# Altium PCB ELC102 - Score Board.PcbDoc (part 4 of 4)
Units mil, origin at the board's own origin, x right, y up, seen from the top; angles counter-clockwise.
Board outline 15000 x 7000 mil, 4 copper layers (Top Layer, Ground, Power, Bottom Layer); 609 components, 525 nets, 1780 pads, 561 vias.
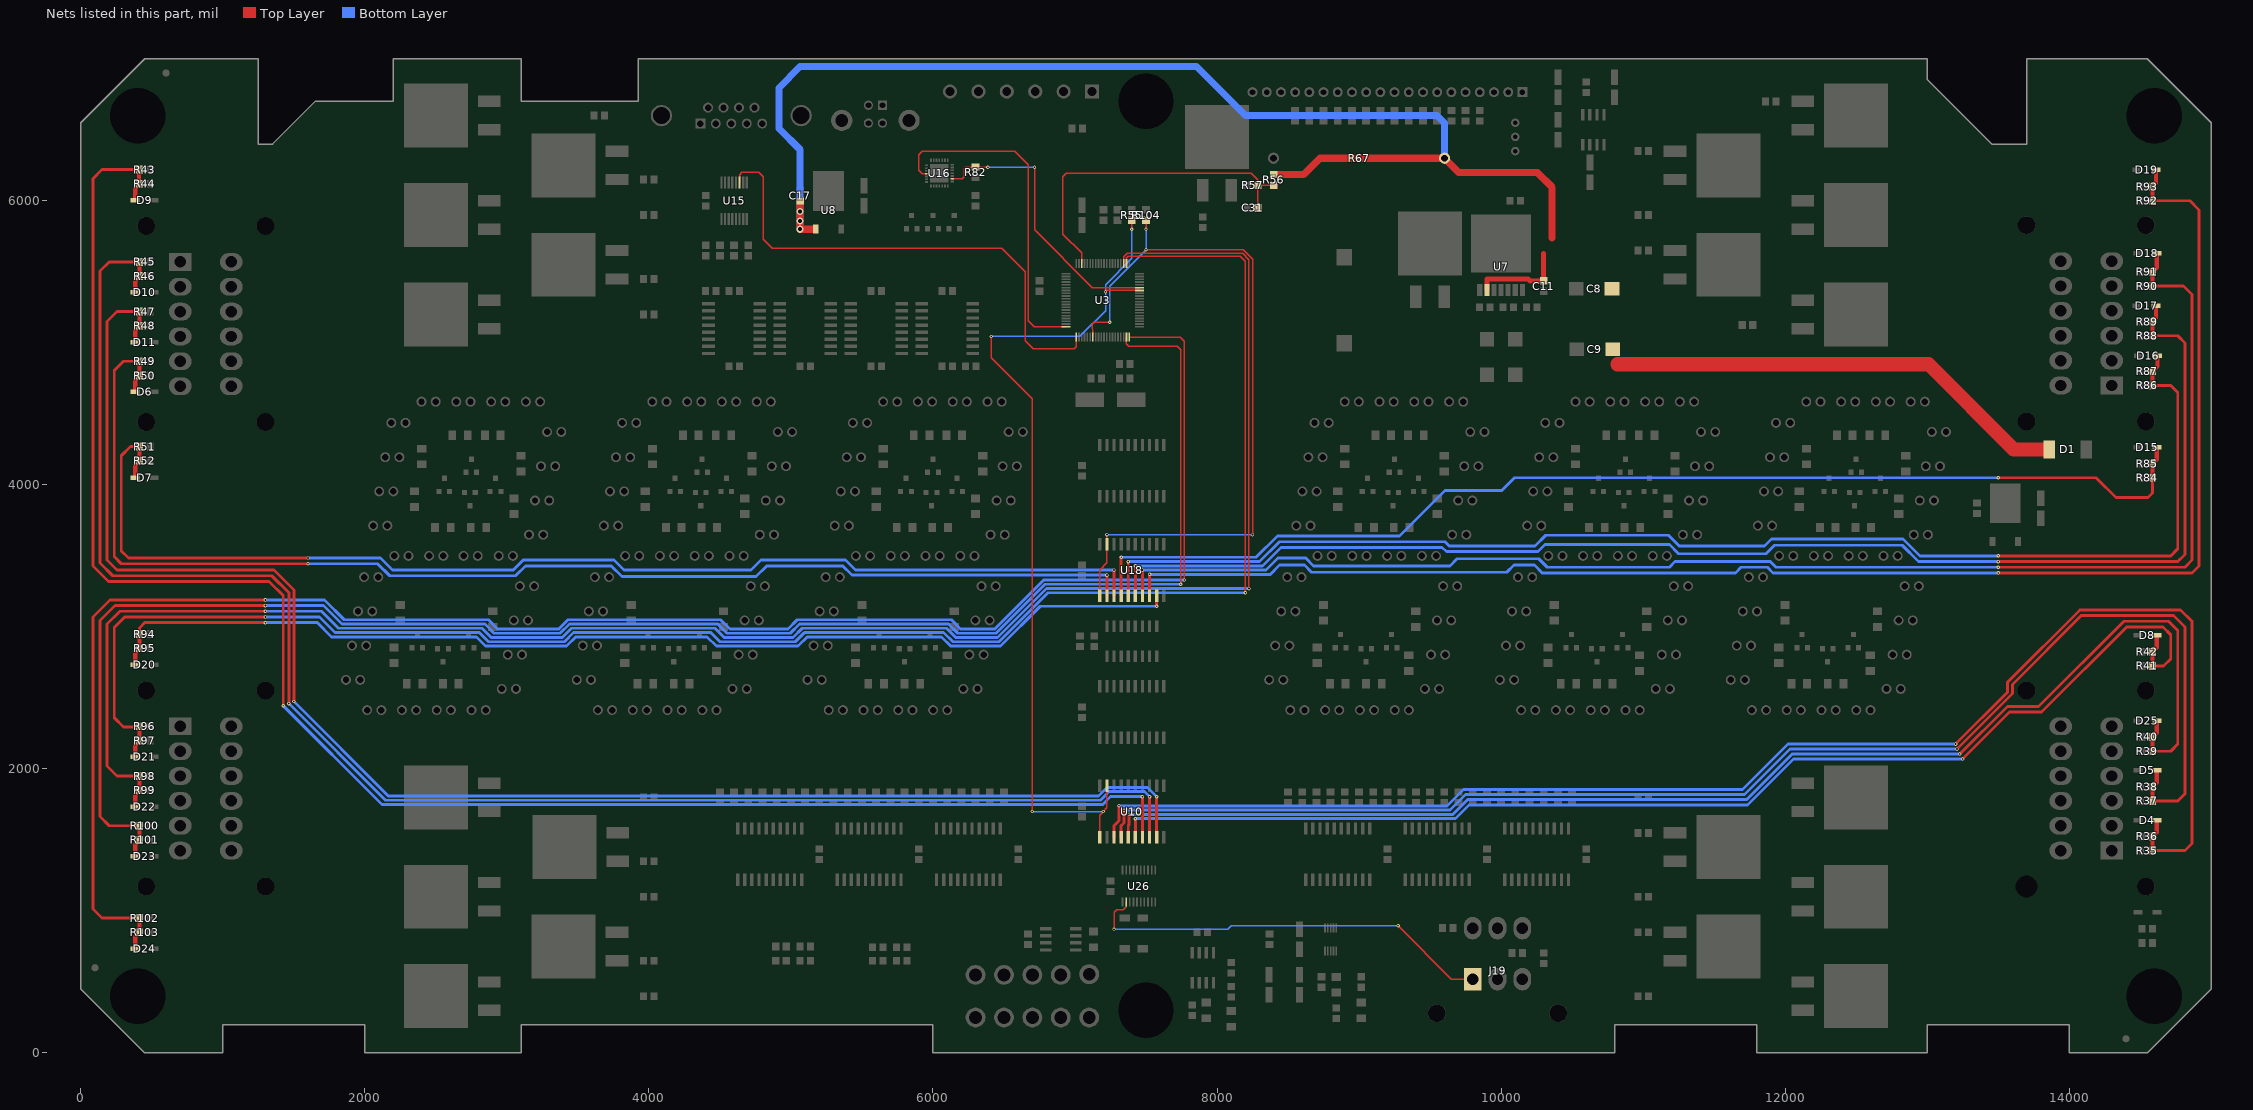
[diagram p6: the nets of this part, all layers, seen from the top]

## Via types
v1: diameter 24, hole 12, Top Layer to Bottom Layer, 468 vias
v2: diameter 50, hole 28, Top Layer to Bottom Layer, 93 vias

## Nets (pads, with @x,y where several pads share a name; then routed paths per layer and width w, separated by ;. In a path a pad name is that pad's centre, name@x,y a point inside that pad or via, vN(x,y) a via of type N, cw(c..) or ccw(c..) an arc to the next point about the centre after c; other vN are vias at no path point) (continued)
SWITCH1: D4.2 R35.1 R36.1 U10.3 | length 10527.5
  Top Layer w20: U10.3@7275,1518.9 7275,1600 7310,1635 v1(7310,1740) ; v1(13200,2175) 13565,2540 13565,2610 14075,3120 14785,3120 14865,3040 14865,1475 14815,1425 R35.1@14587,1425
  Top Layer w30: R35.1@14587,1425 R36.1@14587,1525 14616.93,1554.93 D4.2@14616.93,1640
  Bottom Layer w20: v1(7310,1740) 9620,1740 9735,1855 11700,1855 12020,2175 v1(13200,2175)
SWITCH2: D5.2 R37.1 R38.1 U10.4 | length 9959.2
  Top Layer w20: U10.4@7325,1518.9 7325,1600 7345,1620 v1(7345,1710) ; v1(13210,2140) 13600,2530 13600,2595 14085,3080 14735,3080 14815,3000 14815,1825 14765,1775 R37.1@14587,1775
  Top Layer w30: R37.1@14587,1775 R38.1@14587,1875 14616.93,1904.93 D5.2@14616.93,1990
  Bottom Layer w20: v1(7345,1710) 9640,1710 9750,1820 11715,1820 12035,2140 v1(13210,2140)
SWITCH3: D25.2 R39.1 R40.1 U10.5 | length 9364.5
  Top Layer w20: U10.5@7375,1518.9 7375,1600 7380,1605 v1(7380,1680) ; v1(13230,2105) 13565,2440 13785,2440 14385,3040 14700,3040 14765,2975 14765,2175 14715,2125 R39.1@14587,2125
  Top Layer w30: R39.1@14587,2125 R40.1@14587,2225 14616.93,2254.93 D25.2@14616.93,2340
  Bottom Layer w20: v1(7380,1680) 9660,1680 9765,1785 11730,1785 12050,2105 v1(13230,2105)
SWITCH4: D8.2 R41.1 R42.1 U10.6 | length 8544.2
  Top Layer w20: U10.6@7425,1518.9 v1@7425,1645 ; v1(13250,2070) 13580,2400 13805,2400 14405,3000 14660,3000 14715,2945 14715,2775 14665,2725 R41.1@14587,2725
  Top Layer w30: R41.1@14587,2725 R42.1@14587,2825 14616.93,2854.93 D8.2@14616.93,2940
  Bottom Layer w20: v1(7425,1650) 9680,1650 9775,1745 11735,1745 12060,2070 v1(13250,2070)
SWITCH5: D9.2 R43.1 R44.1 U10.7 | length 12153.1
  Top Layer w20: R43.1@413,6220 410,6220 150,6220 85,6155 85,3430 195,3320 1325,3320 1425,3220 v1(1425,2445) ; U10.7@7475,1518.9 v1(7475,1805)
  Top Layer w30: D9.2@383.07,6005 383.07,6090.07 R44.1@413,6120 ; R44.1@410,6123 R43.1@410,6220
  Bottom Layer w20: v1(1425,2445) 2120,1750 7195,1750 7250,1805 v1(7475,1805)
SWITCH6: D10.2 R45.1 R46.1 U10.8 | length 11451.4
  Top Layer w20: R45.1@413,5570 200,5570 135,5505 135,3450 225,3360 1345,3360 1465,3240 v1(1465,2460) ; U10.8@7525,1518.9 v1(7525,1805)
  Top Layer w30: D10.2@383.07,5355 383.07,5440.07 R46.1@413,5470 R45.1@413,5570
  Bottom Layer w20: v1(1465,2460) 2145,1780 7180,1780 7240,1840 7490,1840 v1(7525,1805)
SWITCH7: D11.2 R47.1 R48.1 U10.9 | length 11039.7
  Top Layer w20: R47.1@413,5220 255,5220 185,5150 185,3470 255,3400 1360,3400 1500,3260 v1(1500,2475) ; U10.9@7575,1518.9 v1(7575,1805)
  Top Layer w30: D11.2@383.07,5005 383.07,5090.07 R48.1@413,5120 R47.1@413,5220
  Bottom Layer w20: v1(1500,2475) 2165,1810 7165,1810 7225,1870 7510,1870 v1(7575,1805)
SWITCH8: D6.2 R49.1 R50.1 U18.2 | length 9052.4
  Top Layer w20: R49.1@413,4870 300,4870 235,4805 235,3495 285,3445 v1(1600,3445) ; U18.2@7225,3218.9 v1(7225,3365)
  Top Layer w30: D6.2@383.07,4655 383.07,4740.07 R50.1@413,4770 R49.1@413,4870
  Bottom Layer w20: v1(1600,3445) 2090,3445 2175,3360 3060,3360 3130,3430 3735,3430 3810,3355 4755,3355 4830,3430 5365,3430 5430,3365 v1(7225,3365)
SWITCH9: D7.2 R51.1 R52.1 U18.3 | length 8400.3
  Top Layer w20: R51.1@413,4270 350,4270 285,4205 285,3535 335,3485 v1(1600,3485) ; U18.3@7275,3218.9 v1(7275,3400)
  Top Layer w30: D7.2@383.07,4050 383.07,4140.07 R52.1@413,4170 R51.1@413,4270
  Bottom Layer w20: v1(1600,3485) 2110,3485 2195,3400 3045,3400 3115,3470 3755,3470 3825,3400 4720,3400 4790,3470 5385,3470 5455,3400 v1(7275,3400)
SWITCH10: D15.2 R84.1 R85.1 U18.4 | length 8171.1
  Top Layer w20: U18.4@7325,3218.9 v1(7325,3490) ; v1(13500,4050) 14190,4050 14330,3910 14554,3910 14587,3943 R84.1@14587,4050
  Top Layer w30: R84.1@14587,4050 R85.1@14587,4150 14616.93,4179.93 D15.2@14616.93,4265
  Bottom Layer w20: v1(7325,3490) 8275,3490 8425,3640 9285,3640 9605,3960 10005,3960 10095,4050 v1(13500,4050)
SWITCH11: D16.2 R86.1 R87.1 U18.5 | length 9378
  Top Layer w20: U18.5@7375,3218.9 v1(7375,3460) ; v1(13500,3500) 14715,3500 14765,3550 14765,4650 14715,4700 R86.1@14587,4700
  Top Layer w30: R86.1@14587,4700 R87.1@14587,4800 14621.93,4834.93 D16.2@14621.93,4910
  Bottom Layer w20: v1(7375,3460) 8300,3460 8440,3600 9605,3600 9635,3570 10240,3570 10315,3645 11180,3645 11255,3570 11855,3570 11905,3620 12830,3620 12950,3500 v1(13500,3500)
SWITCH12: D17.2 R88.1 R89.1 U18.6 | length 9767.2
  Top Layer w20: U18.6@7425,3218.9 v1(7425,3430) ; v1(13500,3460) 14765,3460 14815,3510 14815,5000 14765,5050 R88.1@14587,5050
  Top Layer w30: R88.1@14587,5050 R89.1@14587,5150 14611.93,5174.93 D17.2@14611.93,5260
  Bottom Layer w20: v1(7425,3430) 8320,3430 8450,3560 9585,3560 9615,3530 10260,3530 10310,3580 11185,3580 11250,3515 11865,3515 11925,3575 12825,3575 12940,3460 v1(13500,3460)
SWITCH13: D18.2 R90.1 R91.1 U18.7 | length 10143.8
  Top Layer w20: U18.7@7475,3218.9 v1(7475,3400) ; v1(13500,3420) 14815,3420 14865,3470 14865,5340 14805,5400 R90.1@14587,5400
  Top Layer w30: R90.1@14587,5400 R91.1@14587,5500 14616.93,5529.93 D18.2@14616.93,5630
  Bottom Layer w20: v1(7475,3400) 8345,3400 8430,3485 8625,3485 8680,3430 9640,3430 9690,3480 10265,3480 10325,3420 11185,3420 11225,3460 11895,3460 11935,3420 v1(13500,3420)
SWITCH14: D19.2 R92.1 R93.1 U18.8 | length 10776.3
  Top Layer w20: U18.8@7525,3218.9 v1(7525,3370) ; v1(13500,3380) 14865,3380 14915,3430 14915,5935 14850,6000 R92.1@14587,6000
  Top Layer w30: R92.1@14587,6000 R93.1@14587,6100 14611.93,6124.93 D19.2@14611.93,6220
  Bottom Layer w20: v1(7525,3370) 8375,3370 8440,3435 8615,3435 8665,3385 10040,3385 10090,3435 10235,3435 10290,3380 11650,3380 11690,3420 11875,3420 11915,3380 v1(13500,3380)
SWITCH15: D20.2 R94.1 R95.1 U18.9 | length 7813.6
  Top Layer w20: R94.1@413,2950 413,2993 450,3030 v1(1300,3030) ; v1(7575,3145) U18.9@7575,3218.9
  Top Layer w30: D20.2@383.07,2735 383.07,2820.07 R95.1@413,2850 R94.1@413,2950
  Bottom Layer w20: v1(1300,3030) 1665,3030 1765,2930 2785,2930 2850,2865 3420,2865 3485,2930 4410,2930 4475,2865 5050,2865 5115,2930 6060,2930 6125,2865 6475,2865 6755,3145 v1(7575,3145)
SWITCH16: D21.2 R96.1 R97.1 U3.2 | length 12609.3
  Top Layer w10: U3.2@7362.32,5559.84 7362.32,5597.32 7375,5610 8165,5610 8200,5575 v1(8200,3240)
  Top Layer w20: R96.1@413,2295 300,2295 235,2360 235,2995 310,3070 v1(1300,3070)
  Top Layer w30: D21.2@383.07,2085 383.07,2170.07 R97.1@413,2200 413,2295 R96.1@413,2300
  Bottom Layer w20: v1(1300,3070) 1680,3070 1790,2960 2805,2960 2870,2895 3405,2895 3470,2960 4435,2960 4500,2895 5030,2895 5090,2955 ; 5095,2960 6075,2960 6140,2895 6465,2895 6810,3240 v1(8200,3240)
SWITCH17: D22.2 R98.1 R99.1 U3.3 | length 13160.5
  Top Layer w10: U3.3@7342.64,5559.84 7342.64,5605.14 7367.5,5630 8180,5630 8225,5585 v1(8225,3270)
  Top Layer w20: R98.1@413,1950 255,1950 185,2020 185,3020 275,3110 v1(1300,3110)
  Top Layer w30: D22.2@383.07,1735 383.07,1820.07 R99.1@413,1850 R98.1@413,1950
  Bottom Layer w20: v1(1300,3110) 1695,3110 1815,2990 2825,2990 2890,2925 3390,2925 3455,2990 4465,2990 4530,2925 5015,2925 5080,2990 6095,2990 6160,2925 6455,2925 6800,3270 v1(8225,3270)
SWITCH18: D23.2 R100.1 R101.1 U3.59 | length 11995
  Top Layer w10: U3.59@7362.32,5040.16 7362.32,4992.68 7380,4975 7720,4975 7745,4950 v1(7745,3300)
  Top Layer w20: R100.1@413,1600 200,1600 135,1665 135,3045 240,3150 v1(1300,3150)
  Top Layer w30: D23.2@383.07,1385 383.07,1470.07 R101.1@413,1500 R100.1@413,1600
  Bottom Layer w20: v1(1300,3150) 1710,3150 1840,3020 2845,3020 2910,2955 3375,2955 3440,3020 4485,3020 4550,2955 4995,2955 5060,3020 6110,3020 6175,2955 6445,2955 6790,3300 v1(7745,3300)
SWITCH19: D24.2 R102.1 R103.1 U3.60 | length 12788
  Top Layer w10: U3.60@7382.01,5040.16 7739.84,5040.16 7770,5010 v1(7770,3330)
  Top Layer w20: R102.1@413,950 150,950 85,1015 85,3070 205,3190 v1(1300,3190)
  Top Layer w30: D24.2@383.07,735 383.07,820.07 R103.1@413,850 R102.1@413,950
  Bottom Layer w20: v1(1300,3190) 1715,3190 1855,3050 2870,3050 2935,2985 3365,2985 3430,3050 4505,3050 4570,2985 4980,2985 5045,3050 6130,3050 6195,2985 6435,2985 6780,3330 v1(7770,3330)
SWITCHES0-7: R55.2 U3.74 U10.1 U10.19 | length 6185.8
  Top Layer w10: v1(6410,5045) 6410,4895 6700,4605 v1(6700,1700) ; U10.1@7175,1518.9 7175,1675 v1(7200,1700) 7225,1725 U10.19@7225,1881.1 ; v1(7215,5360) 7223.9,5368.9 U3.74@7454.84,5368.9 ; v1(7400,5800) R55.2@7400,5863
  Bottom Layer w10: v1(6410,5045) 7035,5045 7215,5225 v1(7215,5360) 7215,5410 7400,5595 v1(7400,5800) ; v1(6700,1700) v1(7200,1700)
SWITCHES8-15: R104.2 U3.47 U18.1 U18.19 | length 5240.9
  Top Layer w10: U3.47@7126.1,5040.16 7126.1,5093.9 7120,5100 7120,5130 7135,5145 v1(7245,5145) ; U18.1@7175,3218.9 7175,3400 7225,3450 U18.19@7225,3581.1 v1(7225,3650) ; v1(7500,5655) 8185,5655 8250,5590 v1(8250,3650) ; v1(7500,5800) R104.2@7500,5863
  Bottom Layer w10: v1(7225,3650) v1(8250,3650) ; v1(7245,5145) 7245,5400 v1(7500,5655) v1(7500,5800)
TXD_RS233: U3.41 U15.11 | length 3559
  Top Layer w10: U15.11@4638.39,6128.94 4638.39,6183.39 4655,6200 4775,6200 4805,6170 4805,5730 4870,5665 6485,5665 6650,5500 6650,5015 6705,4960 6995,4960 7007.99,4972.99 U3.41@7007.99,5040.16
TXD_USB: U3.40 U16.25 | length 2376.6
  Top Layer w10: U16.25@5954.45,6191.06 5923.94,6191.06 5900,6215 5900,6325 5925,6350 6575,6350 6670,6255 6670,5155 6712.01,5112.99 U3.40@6935.16,5112.99
USB_RST: R82.1 U3.75 U16.9 | length 1993.6
  Top Layer w10: U16.9@6135.55,6155.63 6205.63,6155.63 6220,6170 6220,6225 6232,6237 R82.1@6300,6237 v1(6387,6237) ; v1@6715,6235 6715,5795 7121.42,5388.58 U3.75@7454.84,5388.58
  Bottom Layer w10: v1(6387,6237) v1(6715,6237)
VBAT: D1.A J2.1 J6.1 J11.6 J11.7 J12.6 J12.7 J16.6 J16.7 J17.6 J17.7 | length 3057
  Top Layer w100: J17.6@700,1425 J17.7@1059,1425 ; J12.6@700,4695 J12.7@1059,4695 J12.7@1060,4695 ; J11.7@13941,2300 J11.6@14300,2300 ; J16.7@13941,5575 J16.6@14300,5575 ; D1.A@14120,4250 14120,5570
  Top Layer w150: J2.1@6500,250 J6.1@6500,550
VBAT: J19.1 U26.2 | length 2945.2
  Top Layer w10: v1(7275,870) 7275,990 7295,1010 7340,1010 7360.43,1030.43 U26.2@7360.43,1062.8 ; v1(9275,895) 9650,520 J19.1@9800,520
  Bottom Layer w10: v1(7275,870) 8075,870 8100,895 v1(9275,895)
VIN: C8.1 C9.1 C11.1 C17.1 D1.K R56.2 R67.1 U7.2 U8.1 | length 12919.2
  Top Layer w35: U7.2@9900,5372 9900,5450 10190,5450 10203,5437 C11.1@10300,5437 10300,5630
  Top Layer w50: C17.1@5065,5998 v2(5065.06,5924.14) v2(5065.11,5859.14) v2(5065.16,5800.16) U8.1@5165,5800.16 ; R56.2@8400,6184 8609,6184 8725,6300 R67.1@9602.36,6300 9702.36,6200 10255,6200 10360,6095 10360,5740
  Top Layer w100: 10820,4850 13010,4850 13610,4250 D1.K@13850,4250
  Bottom Layer w50: v2(5065.16,5800.16) 5065.16,5859.14 5065.16,5924.14 5065.16,6359.84 4915,6510 4915,6795 5065,6945 7855,6945 8200,6600 9549.72,6600 9602.36,6547.36 R67.1@9602.36,6300
VIN_SENSE_ANALOG: C31.1 R56.1 R57.2 U3.18 | length 2377.8
  Top Layer w10: U3.18@7047.36,5559.84 7047.36,5632.64 6915,5765 6915,6170 6940,6195 8240,6195 8287,6148 R57.2@8287,6110 ; C31.1@8287,5950 R57.2@8287,6110 ; R56.1@8400,6110 R57.2@8287,6110
pads on no net: D2.1 D12.2 D13.2 D14.2 FID1.1 FID2.1 FID3.1 J11.0 J12.0 J13.6 J14.0 J15.1 J15.4 J15.6 J15.7 J15.8 J15.9 J16.0 J17.0 J18.18 J19.0 J19.2 J19.5 M1.0 M2.0 M3.0 M4.0 M5.0 M6.0 U2.3 U2.4 U2.5 U2.6 U2.11 U2.12 U2.13 U2.14 U3.4 U3.5 U3.16 U4.7 U5.5 U6.3 U6.4 U6.5 U6.6 U6.11 U6.12 U6.13 U6.14 U7.5 U9.3 U9.4 U9.5 U9.6 U9.11 U9.12 U9.13 U9.14 U13.3 U13.4 U13.5 U13.6 U13.11 U13.12 U13.13 U13.14 U14.12 U16.0 U16.1 U16.2 U16.10 U16.11 U16.12 U16.13 U16.14 U16.15 U16.16 U16.17 U16.18 U16.19 U16.20 U16.21 U16.22 U16.23 U16.24 U16.27 U16.28 U17.1 U17.6 U17.7 U26.4 U26.6 U26.7 U26.8 U26.9 U26.13 U26.18 U26.19 Y2.0 Y2.2 Y2.3

## Polygon pours and split planes (outlines as drawn)
VIN on Top Layer "Vin" (solid, remove dead copper, pour order 1004): 10650,4650 11000,4650 11000,5600 10825,5600 10825,5750 10775,5800 10260,5800 10260,5600 10350,5600 10650,5600
GND on Top Layer "GND" (solid, remove dead copper, pour order 1003): 9200,5400 9200,4900 10300,4900 10300,4650 10650,4650 10650,5600 10350,5600 10350,5400 9800,5400 9500,5400
NetC15_2 on Top Layer "C15_2" (solid, remove dead copper, pour order 1002): 8700,5250 8700,5800 8900,6000 9750,6000 9750,5415 9200,5415 9200,5250
"+8 VDC" on Top Layer "8 VDC" (solid, remove dead copper, pour order 1001): 8700,5250 8700,4650 10300,4650 10300,4900 10290,4900 10250,4900 10215,4900 9200,4900 9200,5250
GND on Top Layer "3.3VDC GND" (solid, remove dead copper, pour order 1000): 5100,6300 5100,5870 5450,5870 5450,6300
"+3.3 VDC" on Top Layer "3.3VDC" (solid, remove dead copper, pour order 1001): 5300,5870 5300,5735 5600,5735 5600,6035 5455,6035 5455,5870
GND on Top Layer "GND" (solid, pour order 1000): 9785,5960 9785,5890 10215,5890 10215,5960 9785,5960
VBAT on Bottom Layer "Vbat" (solid, remove dead copper, pour order 1000): 0,7000 0,0 15000,0 15000,7000 13800,7000 13800,800 1200,800 1200,7000
GND on Ground (split plane): 234 vertices, not listed, extent 20.1,20.1 14979.9,6979.9
GND on Ground (split plane): 3995.92,4756.69 3843.31,4604.08 3501.69,4604.08 3302.88,4802.88 3301.56,4803.77 3300,4804.08 3104.08,4804.08 3104.08,5095.92 3995.92,5095.92
GND on Ground (split plane): 4545.92,1160 4546.23,1158.44 4547.12,1157.12 4795.92,908.31 4795.92,854.08 4304.08,854.08 4304.08,1595 4303.9,1595.92 4545.92,1595.92
GND on Ground (split plane): 13645.92,3104.08 13400,3104.08 13398.44,3103.77 13397.12,3102.88 13396.23,3101.56 13395.92,3100 13395.92,2501.69 13204.08,2309.85 13204.08,2350 13204.08,3295.92 13645.92,3295.92
GND on Ground (split plane): 2245.92,4948.31 2245.92,4654.08 1654.08,4654.08 1654.08,4848.31 1851.69,5045.92 2148.31,5045.92
GND on Ground (split plane): 11295.92,5250 11296.23,5248.44 11297.12,5247.12 11298.44,5246.23 11300,5245.92 11595.92,5245.92 11595.92,4954.08 11054.08,4954.08 11054.08,5340.92 11295.92,5340.92
GND on Ground (split plane): 7695.92,6254.08 6819.08,6254.08 6819.08,6445.92 7695.92,6445.92
GND on Ground (split plane): 1695.92,3554.08 1254.08,3554.08 1254.08,3895.92 1695.92,3895.92
GND on Ground (split plane): 11790.15,6554.08 11159.85,6554.08 11336.69,6730.92 11613.31,6730.92
GND on Ground (split plane): 6595.92,6424.08 6009.08,6424.08 6009.08,6545.92 6595.92,6545.92
GND on Ground (split plane): 11010.92,6116.69 10848.31,5954.08 10609.85,5954.08 10906.69,6250.92 11010.92,6250.92
GND on Ground (split plane): 3250.15,1904.08 3131.69,1904.08 2942.88,2092.88 2941.56,2093.77 2940,2094.08 2504.08,2094.08 2504.08,2165.92 2988.31,2165.92
GND on Ground (split plane): 10190.92,4359.08 9989.08,4359.08 9989.08,4445 9988.77,4446.56 9987.88,4447.88 9879.08,4556.69 9879.08,4595.92 10190.92,4595.92
GND on Ground (split plane): 1654.08,6009.85 1654.08,6345.92 1990.15,6345.92
GND on Ground (split plane): 6595.92,5804.08 6454.08,5804.08 6454.08,6145.92 6595.92,6145.92
GND on Ground (split plane): 2097.12,997.12 2098.44,996.23 2100,995.92 2195.92,995.92 2195.92,864.08 2041.69,864.08 1904.08,1001.69 1904.08,1190.15
GND on Ground (split plane): 5495.92,4604.08 5004.08,4604.08 5004.08,4695.92 5495.92,4695.92
GND on Ground (split plane): 11828.31,4554.08 11609.85,4554.08 11801.69,4745.92 12020.15,4745.92
GND on Ground (split plane): 13033.31,1554.08 12839.08,1554.08 12839.08,1695.92 13175.15,1695.92
GND on Ground (split plane): 13155.92,1904.08 12834.08,1904.08 12834.08,2015.92 13155.92,2015.92
GND on Ground (split plane): 12973.31,1204.08 12834.08,1204.08 12834.08,1345.92 13115.15,1345.92
GND on Ground (split plane): 11015.92,1249.08 10864.08,1249.08 10864.08,1435.92 11015.92,1435.92
GND on Ground (split plane): 12945.92,2254.08 12754.08,2254.08 12754.08,2395.92 12945.92,2395.92
GND on Ground (split plane): 11695.92,2154.08 11459.85,2154.08 11651.69,2345.92 11695.92,2345.92
GND on Ground (split plane): 2190.92,1944.85 1959.85,2175.92 2190.92,2175.92
GND on Ground (split plane): 10850.92,1601.69 10763.31,1514.08 10696.69,1514.08 10642.88,1567.88 10641.56,1568.77 10640,1569.08 10584.08,1569.08 10584.08,1645.92 10850.92,1645.92
GND on Ground (split plane): 13430.92,4233.31 13430.92,4174.08 13239.08,4174.08 13239.08,4345.92 13318.31,4345.92
GND on Ground (split plane): 8410.92,1839.08 8294.08,1839.08 8294.08,2060.92 8410.92,2060.92
GND on Ground (split plane): 7595.92,4394.08 7110.09,4394.08 7110.09,4445.92 7595.92,4445.92
GND on Ground (split plane): 10945.92,3004.08 10754.08,3004.08 10754.08,3078.31 10801.69,3125.92 10945.92,3125.92
GND on Ground (split plane): 10640.92,974.08 10504.08,974.08 10504.08,1125.92 10640.92,1125.92
GND on Ground (split plane): 13275.92,3663.31 13275.92,3584.08 13129.08,3584.08 13129.08,3750.92 13188.31,3750.92
GND on Ground (split plane): 5855.92,3254.08 5720,3254.08 5718.44,3253.77 5717.12,3252.88 5657.12,3192.88 5656.23,3191.56 5655.92,3190 5655.92,3104.08 5604.08,3104.08 5604.08,3295.92 5855.92,3295.92
GND on Ground (split plane): 12545.92,3004.08 12404.08,3004.08 12404.08,3145.92 12545.92,3145.92
GND on Ground (split plane): 8435.92,4479.08 8364.08,4479.08 8364.08,4745.92 8435.92,4745.92
GND on Ground (split plane): 10545.92,3004.08 10454.08,3004.08 10454.08,3195.92 10545.92,3195.92
GND on Ground (split plane): 9295.92,3004.08 9154.08,3004.08 9154.08,3125.92 9295.92,3125.92
GND on Ground (split plane): 2205.92,2559.08 2064.08,2559.08 2064.08,2680.92 2205.92,2680.92
GND on Ground (split plane): 9040.92,4304.08 8986.69,4304.08 8904.08,4386.69 8904.08,4450.92 9040.92,4450.92
GND on Ground (split plane): 11275.92,5949.08 11139.08,5949.08 11139.08,6065.92 11275.92,6065.92
GND on Ground (split plane): 12295.92,4274.08 12229.08,4274.08 12229.08,4330 12228.77,4331.56 12227.88,4332.88 12154.08,4406.69 12154.08,4435.92 12295.92,4435.92
GND on Ground (split plane): 8695.92,2569.08 8559.08,2569.08 8559.08,2680.92 8695.92,2680.92
GND on Ground (split plane): 2435.92,3104.08 2344.08,3104.08 2344.08,3260.92 2435.92,3260.92
GND on Ground (split plane): 10665.92,4304.08 10621.69,4304.08 10539.08,4386.69 10539.08,4440.92 10665.92,4440.92
GND on Ground (split plane): 10345.92,2554.08 10204.08,2554.08 10204.08,2645.92 10345.92,2645.92
GND on Ground (split plane): 5615.92,3676.69 5598.31,3659.08 5504.08,3659.08 5504.08,3775.92 5615.92,3775.92
GND on Ground (split plane): 8920.92,3004.08 8854.08,3004.08 8854.08,3195.92 8920.92,3195.92
GND on Ground (split plane): 5455.92,2559.08 5329.08,2559.08 5329.08,2655.92 5455.92,2655.92
GND on Ground (split plane): 4045.92,3104.08 3959.08,3104.08 3959.08,3240.92 4045.92,3240.92
GND on Ground (split plane): 12150.92,3004.08 12089.08,3004.08 12089.08,3195.92 12150.92,3195.92
GND on Ground (split plane): 3830.92,2569.08 3704.08,2569.08 3704.08,2660.92 3830.92,2660.92
GND on Ground (split plane): 8865.92,3689.08 8759.08,3689.08 8759.08,3770.92 8865.92,3770.92
GND on Ground (split plane): 2395.92,3589.08 2351.69,3589.08 2304.08,3636.69 2304.08,3695.92 2395.92,3695.92
GND on Ground (split plane): 11945.92,2554.08 11854.08,2554.08 11854.08,2645.92 11945.92,2645.92
GND on Ground (split plane): 11198.31,2354.08 11104.08,2354.08 11104.08,2415.92 11260.15,2415.92
GND on Ground (split plane): 3595.92,3584.08 3454.08,3584.08 3454.08,3635.92 3595.92,3635.92
GND on Ground (split plane): 7089.91,4394.08 7061.69,4394.08 7009.85,4445.92 7089.91,4445.92
"+3.3 VDC" on Power (split plane): 159 vertices, not listed, extent 20.1,20.1 14979.9,6979.9
"+8 VDC" on Power (split plane): 10289.91,4700 10290.26,4697.39 10291.26,4694.96 10292.87,4692.87 10294.96,4691.27 10297.39,4690.26 10300,4689.91 11734.15,4689.91 11597.12,4552.88 11596.23,4551.56 11595.92,4550 11596.23,4548.44 11597.12,4547.12 11598.44,4546.23 11600,4545.92 11830,4545.92 11831.56,4546.23 11832.88,4547.12 11975.68,4689.91 13189.91,4689.91 13189.91,3759.08 13125,3759.08 13123.44,3758.77 13122.12,3757.88 13121.23,3756.56 13120.92,3755 13120.92,3580 13121.23,3578.44 13122.12,3577.12 13123.44,3576.23 13125,3575.92 13189.91,3575.92 13189.91,2310.09 12954.08,2310.09 12954.08,2400 12953.77,2401.56 12952.88,2402.88 12951.56,2403.77 12950,2404.08 12750,2404.08 12748.44,2403.77 12747.12,2402.88 12746.23,2401.56 12745.92,2400 12745.92,2310.09 11704.08,2310.09 11704.08,2350 11703.77,2351.56 11702.88,2352.88 11701.56,2353.77 11700,2354.08 11650,2354.08 11648.44,2353.77 11647.12,2352.88 11604.32,2310.09 8210.09,2310.09 8210.09,4689.91 8355.92,4689.91 8355.92,4475 8356.23,4473.44 8357.12,4472.12 8358.44,4471.23 8360,4470.92 8440,4470.92 8441.56,4471.23 8442.88,4472.12 8443.77,4473.44 8444.08,4475 8444.08,4689.91 8600,4689.91 8602.61,4690.26 8605.04,4691.27 8607.13,4692.87 8608.74,4694.96 8609.74,4697.39 8610.09,4700 8610.09,4889.91 10289.91,4889.91
"+8 VDC" on Power (split plane): 6789.91,2310.09 1810.09,2310.09 1810.09,4645.92 2250,4645.92 2251.56,4646.23 2252.88,4647.12 2253.77,4648.44 2254.08,4650 2254.08,4689.91 3404.32,4689.91 3497.12,4597.12 3498.44,4596.23 3500,4595.92 3845,4595.92 3846.56,4596.23 3847.88,4597.12 3940.68,4689.91 4995.92,4689.91 4995.92,4600 4996.23,4598.44 4997.12,4597.12 4998.44,4596.23 5000,4595.92 5500,4595.92 5501.56,4596.23 5502.88,4597.12 5503.77,4598.44 5504.08,4600 5504.08,4689.91 6789.91,4689.91
no net on Power (split plane): 3995.92,4756.69 3949.32,4710.09 3395.68,4710.09 3302.88,4802.88 3301.56,4803.77 3300,4804.08 3104.08,4804.08 3104.08,5095.92 3995.92,5095.92
no net on Power (split plane): 4545.92,1160 4546.23,1158.44 4547.12,1157.12 4795.92,908.31 4795.92,854.08 4304.08,854.08 4304.08,1595 4303.9,1595.92 4545.92,1595.92
no net on Power (split plane): 13645.92,3104.08 13400,3104.08 13398.44,3103.77 13397.12,3102.88 13396.23,3101.56 13395.92,3100 13395.92,2501.69 13210.09,2315.85 13210.09,3295.92 13645.92,3295.92
no net on Power (split plane): 2245.92,4948.31 2245.92,4710.09 1800,4710.09 1797.39,4709.74 1794.96,4708.73 1792.87,4707.13 1791.26,4705.04 1790.26,4702.61 1789.91,4700 1789.91,4654.08 1654.08,4654.08 1654.08,4848.31 1851.69,5045.92 2148.31,5045.92
no net on Power (split plane): 11295.92,5250 11296.23,5248.44 11297.12,5247.12 11298.44,5246.23 11300,5245.92 11595.92,5245.92 11595.92,4954.08 11054.08,4954.08 11054.08,5340.92 11295.92,5340.92
no net on Power (split plane): 7695.92,6254.08 6819.08,6254.08 6819.08,6445.92 7695.92,6445.92
no net on Power (split plane): 1695.92,3554.08 1254.08,3554.08 1254.08,3895.92 1695.92,3895.92
no net on Power (split plane): 11790.15,6554.08 11159.85,6554.08 11336.69,6730.92 11613.31,6730.92
no net on Power (split plane): 6595.92,6424.08 6009.08,6424.08 6009.08,6545.92 6595.92,6545.92
no net on Power (split plane): 11010.92,6116.69 10848.31,5954.08 10609.85,5954.08 10906.69,6250.92 11010.92,6250.92
no net on Power (split plane): 3250.15,1904.08 3131.69,1904.08 2942.88,2092.88 2941.56,2093.77 2940,2094.08 2504.08,2094.08 2504.08,2165.92 2988.31,2165.92
no net on Power (split plane): 10190.92,4359.08 9989.08,4359.08 9989.08,4445 9988.77,4446.56 9987.88,4447.88 9879.08,4556.69 9879.08,4595.92 10190.92,4595.92
no net on Power (split plane): 1654.08,6009.85 1654.08,6345.92 1990.15,6345.92
no net on Power (split plane): 6595.92,5804.08 6454.08,5804.08 6454.08,6145.92 6595.92,6145.92
no net on Power (split plane): 2097.12,997.12 2098.44,996.23 2100,995.92 2195.92,995.92 2195.92,864.08 2041.69,864.08 1904.08,1001.69 1904.08,1190.15
no net on Power (split plane): 5495.92,4604.08 5004.08,4604.08 5004.08,4689.91 5495.92,4689.91
no net on Power (split plane): 13033.31,1554.08 12839.08,1554.08 12839.08,1695.92 13175.15,1695.92
no net on Power (split plane): 3843.31,4604.08 3501.69,4604.08 3415.85,4689.91 3929.15,4689.91
no net on Power (split plane): 13155.92,1904.08 12834.08,1904.08 12834.08,2015.92 13155.92,2015.92
no net on Power (split plane): 12973.31,1204.08 12834.08,1204.08 12834.08,1345.92 13115.15,1345.92
no net on Power (split plane): 11828.31,4554.08 11609.85,4554.08 11745.68,4689.91 11964.15,4689.91
no net on Power (split plane): 7595.92,4394.08 7061.69,4394.08 7009.85,4445.92 7595.92,4445.92
no net on Power (split plane): 11015.92,1249.08 10864.08,1249.08 10864.08,1435.92 11015.92,1435.92
no net on Power (split plane): 2190.92,1944.85 1959.85,2175.92 2190.92,2175.92
no net on Power (split plane): 10850.92,1601.69 10763.31,1514.08 10696.69,1514.08 10642.88,1567.88 10641.56,1568.77 10640,1569.08 10584.08,1569.08 10584.08,1645.92 10850.92,1645.92
no net on Power (split plane): 13430.92,4233.31 13430.92,4174.08 13239.08,4174.08 13239.08,4345.92 13318.31,4345.92
no net on Power (split plane): 8410.92,1839.08 8294.08,1839.08 8294.08,2060.92 8410.92,2060.92
no net on Power (split plane): 11695.92,2154.08 11459.85,2154.08 11595.68,2289.91 11695.92,2289.91
no net on Power (split plane): 10945.92,3004.08 10754.08,3004.08 10754.08,3078.31 10801.69,3125.92 10945.92,3125.92
no net on Power (split plane): 10640.92,974.08 10504.08,974.08 10504.08,1125.92 10640.92,1125.92
no net on Power (split plane): 5855.92,3254.08 5720,3254.08 5718.44,3253.77 5717.12,3252.88 5657.12,3192.88 5656.23,3191.56 5655.92,3190 5655.92,3104.08 5604.08,3104.08 5604.08,3295.92 5855.92,3295.92
no net on Power (split plane): 12545.92,3004.08 12404.08,3004.08 12404.08,3145.92 12545.92,3145.92
no net on Power (split plane): 10545.92,3004.08 10454.08,3004.08 10454.08,3195.92 10545.92,3195.92
no net on Power (split plane): 2205.92,2559.08 2064.08,2559.08 2064.08,2680.92 2205.92,2680.92
no net on Power (split plane): 9295.92,3004.08 9154.08,3004.08 9154.08,3125.92 9295.92,3125.92
no net on Power (split plane): 9040.92,4304.08 8986.69,4304.08 8904.08,4386.69 8904.08,4450.92 9040.92,4450.92
no net on Power (split plane): 12945.92,2310.09 12754.08,2310.09 12754.08,2395.92 12945.92,2395.92
no net on Power (split plane): 11275.92,5949.08 11139.08,5949.08 11139.08,6065.92 11275.92,6065.92
no net on Power (split plane): 12295.92,4274.08 12229.08,4274.08 12229.08,4330 12228.77,4331.56 12227.88,4332.88 12154.08,4406.69 12154.08,4435.92 12295.92,4435.92
no net on Power (split plane): 2245.92,4654.08 1810.09,4654.08 1810.09,4689.91 2245.92,4689.91
no net on Power (split plane): 8695.92,2569.08 8559.08,2569.08 8559.08,2680.92 8695.92,2680.92
no net on Power (split plane): 8435.92,4479.08 8364.08,4479.08 8364.08,4689.91 8435.92,4689.91
no net on Power (split plane): 2435.92,3104.08 2344.08,3104.08 2344.08,3260.92 2435.92,3260.92
no net on Power (split plane): 10665.92,4304.08 10621.69,4304.08 10539.08,4386.69 10539.08,4440.92 10665.92,4440.92
no net on Power (split plane): 10345.92,2554.08 10204.08,2554.08 10204.08,2645.92 10345.92,2645.92
no net on Power (split plane): 5615.92,3676.69 5598.31,3659.08 5504.08,3659.08 5504.08,3775.92 5615.92,3775.92
no net on Power (split plane): 8920.92,3004.08 8854.08,3004.08 8854.08,3195.92 8920.92,3195.92
no net on Power (split plane): 5455.92,2559.08 5329.08,2559.08 5329.08,2655.92 5455.92,2655.92
no net on Power (split plane): 4045.92,3104.08 3959.08,3104.08 3959.08,3240.92 4045.92,3240.92
no net on Power (split plane): 12150.92,3004.08 12089.08,3004.08 12089.08,3195.92 12150.92,3195.92
no net on Power (split plane): 3830.92,2569.08 3704.08,2569.08 3704.08,2660.92 3830.92,2660.92
no net on Power (split plane): 13189.91,3749.32 13189.91,3584.08 13129.08,3584.08 13129.08,3750.92 13188.31,3750.92
no net on Power (split plane): 8865.92,3689.08 8759.08,3689.08 8759.08,3770.92 8865.92,3770.92
no net on Power (split plane): 2395.92,3589.08 2351.69,3589.08 2304.08,3636.69 2304.08,3695.92 2395.92,3695.92
no net on Power (split plane): 11945.92,2554.08 11854.08,2554.08 11854.08,2645.92 11945.92,2645.92
no net on Power (split plane): 11984.32,4710.09 11765.85,4710.09 11801.69,4745.92 12020.15,4745.92
no net on Power (split plane): 11198.31,2354.08 11104.08,2354.08 11104.08,2415.92 11260.15,2415.92
no net on Power (split plane): 13275.92,3663.31 13275.92,3584.08 13210.09,3584.08 13210.09,3729.15
no net on Power (split plane): 3595.92,3584.08 3454.08,3584.08 3454.08,3635.92 3595.92,3635.92
no net on Power (split plane): 12945.92,2254.08 12754.08,2254.08 12754.08,2289.91 12945.92,2289.91
no net on Power (split plane): 8435.92,4710.09 8364.08,4710.09 8364.08,4745.92 8435.92,4745.92
no net on Power (split plane): 11695.92,2310.09 11615.85,2310.09 11651.69,2345.92 11695.92,2345.92

## Keep-outs
Keep-Out Layer:
  lines w8: 4300,1595 4300,850 4800,850 4800,910 4550,1160 4550,1600 4300,1600 ; 9875,4600 10195,4600 10195,4355 9985,4355 9985,4445 9875,4555 9875,4605 ; 0,450 0,6550 450,7000 1250,7000 1250,6400 1350,6400 1650,6700 2200,6700 2200,7000 3100,7000 3100,6700 3925,6700 3925,7000 13000,7000 13000,6855 13455,6400 13700,6400 13700,7000 14550,7000 15000,6550 15000,450 14550,0 14000,0 14000,200 13000,200 13000,0 11800,0 11800,200 10800,200 10800,0 6000,0 6000,200 3100,200 3100,0 2000,0 2000,200 1000,200 1000,0 450,0 0,450 ; 1250,3550 1250,3900 1700,3900 1700,3550 1250,3550 ; 1650,4650 2250,4650 2250,4950 2150,5050 1850,5050 1650,4850 1650,4650 ; 1650,6000 1650,6350 2000,6350 1650,6000 ; 1900,1000 2040,860 2200,860 2200,1000 2100,1000 1900,1200 1900,1000 ; 1950,2180 2195,1935 2195,2180 2000,2180 1950,2180 ; 2060,2555 2060,2685 2210,2685 2210,2555 2060,2555 ; 2300,3635 2300,3700 2400,3700 2400,3585 2350,3585 2300,3635 ; 2340,3100 2340,3265 2440,3265 2440,3100 2340,3100 ; 2500,2090 2500,2170 2990,2170 3260,1900 3130,1900 2940,2090 2500,2090 ; 3100,4800 3100,5100 4000,5100 4000,4755 3845,4600 3500,4600 3300,4800 3100,4800 ; 3450,3580 3450,3640 3600,3640 3600,3580 3450,3580 ; 3700,2565 3700,2665 3835,2665 3835,2565 3700,2565 ; 3955,3100 3955,3245 4050,3245 4050,3100 3955,3100 ; 5000,4600 5000,4700 5500,4700 5500,4600 5000,4600 ; 5325,2555 5325,2660 5460,2660 5460,2555 5325,2555 ; 5500,3655 5500,3780 5620,3780 5620,3675 5600,3655 5500,3655 ; 5600,3100 5600,3300 5860,3300 5860,3250 5720,3250 5660,3190 5660,3100 5600,3100 ; 6450,5800 6450,6150 6600,6150 6600,5800 6450,5800 ; 6815,6250 6815,6450 7700,6450 7700,6250 6815,6250 ; 7000,4450 7600,4450 7600,4390 7060,4390 7000,4450 ; 8290,1835 8290,2065 8415,2065 8415,1835 8290,1835 ; 8360,4475 8360,4750 8440,4750 8440,4475 8360,4475 ; 8555,2565 8555,2685 8700,2685 8700,2565 8555,2565 ; 8755,3685 8755,3775 8870,3775 8870,3685 8755,3685 ; 8850,3000 8850,3200 8925,3200 8925,3000 8850,3000 ; 8900,4385 8900,4455 9045,4455 9045,4300 8985,4300 8900,4385 ; 9150,3000 9150,3130 9300,3130 9300,3000 9150,3000 ; 10200,2550 10200,2650 10350,2650 10350,2550 10200,2550 ; 10450,3000 10450,3200 10550,3200 10550,3000 10450,3000 ; 10500,970 10500,1130 10645,1130 10645,970 10500,970 ; 10535,4385 10535,4445 10670,4445 10670,4300 10620,4300 10535,4385 ; 10580,1565 10640,1565 10695,1510 10765,1510 10855,1600 10855,1650 10580,1650 10580,1565 ; 10600,5950 10850,5950 11015,6115 11015,6255 10905,6255 10600,5950 ; 10750,3000 10950,3000 10950,3130 10800,3130 10750,3080 10750,3000 ; 10860,1245 10860,1440 11020,1440 11020,1245 10860,1245 ; 11050,4950 11600,4950 11600,5250 11300,5250 11300,5345 11050,5345 11050,4950 ; 11100,2350 11100,2420 11270,2420 11200,2350 11100,2350 ; 11135,5945 11135,6070 11280,6070 11280,5945 11135,5945 ; 11150,6550 11800,6550 11615,6735 11335,6735 11150,6550 ; 11450,2150 11700,2150 11700,2350 11650,2350 11450,2150 ; 11600,4550 11830,4550 12030,4750 11800,4750 11600,4550 ; 11850,2550 11850,2650 11950,2650 11950,2550 11850,2550 ; 12085,3000 12085,3200 12155,3200 12155,3000 12085,3000 ; 12150,4405 12225,4330 12225,4270 12300,4270 12300,4440 12150,4440 12150,4405 ; 12400,3000 12400,3150 12550,3150 12550,3000 12400,3000 ; 12750,2250 12750,2400 12950,2400 12950,2250 12750,2250 ; 12830,1200 12830,1350 13125,1350 12975,1200 12830,1200 ; 12830,1900 12830,2020 13160,2020 13160,1900 12830,1900 ; 12835,1550 12835,1700 13185,1700 13035,1550 12835,1550 ; 13125,3580 13125,3755 13190,3755 13280,3665 13280,3580 13125,3580 ; 13200,2300 13400,2500 13400,3100 13650,3100 13650,3300 13200,3300 13200,2350 13200,2300 ; 13235,4170 13235,4350 13320,4350 13435,4235 13435,4170 13235,4170
  lines w10: 6005,6420 6600,6420 6600,6550 6005,6550 6005,6420

## Other copper
Top Layer:
  text ".Layer_Name" at 15100,4785 h45 r90
Bottom Layer:
  text ".Layer_Name" at 15100,4785 h45 r90
Power (plane layer: these items are gaps in the copper):
  lines w8: 4300,1595 4300,850 4800,850 4800,910 4550,1160 4550,1600 4300,1600 ; 9875,4600 10195,4600 10195,4355 9985,4355 9985,4445 9875,4555 9875,4605 ; 1250,3550 1250,3900 1700,3900 1700,3550 1250,3550 ; 1650,4650 2250,4650 2250,4950 2150,5050 1850,5050 1650,4850 1650,4650 ; 1650,6000 1650,6350 2000,6350 1650,6000 ; 1900,1000 2040,860 2200,860 2200,1000 2100,1000 1900,1200 1900,1000 ; 1950,2180 2195,1935 2195,2180 2000,2180 1950,2180 ; 2060,2555 2060,2685 2210,2685 2210,2555 2060,2555 ; 2300,3635 2300,3700 2400,3700 2400,3585 2350,3585 2300,3635 ; 2340,3100 2340,3265 2440,3265 2440,3100 2340,3100 ; 2500,2090 2500,2170 2990,2170 3260,1900 3130,1900 2940,2090 2500,2090 ; 3100,4800 3100,5100 4000,5100 4000,4755 3845,4600 3500,4600 3300,4800 3100,4800 ; 3450,3580 3450,3640 3600,3640 3600,3580 3450,3580 ; 3700,2565 3700,2665 3835,2665 3835,2565 3700,2565 ; 3955,3100 3955,3245 4050,3245 4050,3100 3955,3100 ; 5000,4600 5000,4700 5500,4700 5500,4600 5000,4600 ; 5325,2555 5325,2660 5460,2660 5460,2555 5325,2555 ; 5500,3655 5500,3780 5620,3780 5620,3675 5600,3655 5500,3655 ; 5600,3100 5600,3300 5860,3300 5860,3250 5720,3250 5660,3190 5660,3100 5600,3100 ; 6005,6420 6600,6420 6600,6550 6005,6550 6005,6420 ; 6450,5800 6450,6150 6600,6150 6600,5800 6450,5800 ; 6815,6250 6815,6450 7700,6450 7700,6250 6815,6250 ; 7000,4450 7600,4450 7600,4390 7060,4390 7000,4450 ; 8290,1835 8290,2065 8415,2065 8415,1835 8290,1835 ; 8360,4475 8360,4750 8440,4750 8440,4475 8360,4475 ; 8555,2565 8555,2685 8700,2685 8700,2565 8555,2565 ; 8755,3685 8755,3775 8870,3775 8870,3685 8755,3685 ; 8850,3000 8850,3200 8925,3200 8925,3000 8850,3000 ; 8900,4385 8900,4455 9045,4455 9045,4300 8985,4300 8900,4385 ; 9150,3000 9150,3130 9300,3130 9300,3000 9150,3000 ; 10200,2550 10200,2650 10350,2650 10350,2550 10200,2550 ; 10450,3000 10450,3200 10550,3200 10550,3000 10450,3000 ; 10500,970 10500,1130 10645,1130 10645,970 10500,970 ; 10535,4385 10535,4445 10670,4445 10670,4300 10620,4300 10535,4385 ; 10580,1565 10640,1565 10695,1510 10765,1510 10855,1600 10855,1650 10580,1650 10580,1565 ; 10600,5950 10850,5950 11015,6115 11015,6255 10905,6255 10600,5950 ; 10750,3000 10950,3000 10950,3130 10800,3130 10750,3080 10750,3000 ; 10860,1245 10860,1440 11020,1440 11020,1245 10860,1245 ; 11050,4950 11600,4950 11600,5250 11300,5250 11300,5345 11050,5345 11050,4950 ; 11100,2350 11100,2420 11270,2420 11200,2350 11100,2350 ; 11135,5945 11135,6070 11280,6070 11280,5945 11135,5945 ; 11150,6550 11800,6550 11615,6735 11335,6735 11150,6550 ; 11450,2150 11700,2150 11700,2350 11650,2350 11450,2150 ; 11600,4550 11830,4550 12030,4750 11800,4750 11600,4550 ; 11850,2550 11850,2650 11950,2650 11950,2550 11850,2550 ; 12085,3000 12085,3200 12155,3200 12155,3000 12085,3000 ; 12150,4405 12225,4330 12225,4270 12300,4270 12300,4440 12150,4440 12150,4405 ; 12400,3000 12400,3150 12550,3150 12550,3000 12400,3000 ; 12750,2250 12750,2400 12950,2400 12950,2250 12750,2250 ; 12830,1200 12830,1350 13125,1350 12975,1200 12830,1200 ; 12830,1900 12830,2020 13160,2020 13160,1900 12830,1900 ; 12835,1550 12835,1700 13185,1700 13035,1550 12835,1550 ; 13125,3580 13125,3755 13190,3755 13280,3665 13280,3580 13125,3580 ; 13200,2300 13400,2500 13400,3100 13650,3100 13650,3300 13200,3300 13200,2350 13200,2300 ; 13235,4170 13235,4350 13320,4350 13435,4235 13435,4170 13235,4170
  lines w20: 1800,2300 6800,2300 6800,4700 1800,4700 1800,2300 ; 8200,2300 13200,2300 13200,4700 10300,4700 10300,4900 8600,4900 8600,4700 8200,4700 8200,2300
  text ".Layer_Name" at 15100,4785 h45 r90
Ground (plane layer: these items are gaps in the copper):
  lines w8: 4300,1595 4300,850 4800,850 4800,910 4550,1160 4550,1600 4300,1600 ; 9875,4600 10195,4600 10195,4355 9985,4355 9985,4445 9875,4555 9875,4605 ; 1250,3550 1250,3900 1700,3900 1700,3550 1250,3550 ; 1650,4650 2250,4650 2250,4950 2150,5050 1850,5050 1650,4850 1650,4650 ; 1650,6000 1650,6350 2000,6350 1650,6000 ; 1900,1000 2040,860 2200,860 2200,1000 2100,1000 1900,1200 1900,1000 ; 1950,2180 2195,1935 2195,2180 2000,2180 1950,2180 ; 2060,2555 2060,2685 2210,2685 2210,2555 2060,2555 ; 2300,3635 2300,3700 2400,3700 2400,3585 2350,3585 2300,3635 ; 2340,3100 2340,3265 2440,3265 2440,3100 2340,3100 ; 2500,2090 2500,2170 2990,2170 3260,1900 3130,1900 2940,2090 2500,2090 ; 3100,4800 3100,5100 4000,5100 4000,4755 3845,4600 3500,4600 3300,4800 3100,4800 ; 3450,3580 3450,3640 3600,3640 3600,3580 3450,3580 ; 3700,2565 3700,2665 3835,2665 3835,2565 3700,2565 ; 3955,3100 3955,3245 4050,3245 4050,3100 3955,3100 ; 5000,4600 5000,4700 5500,4700 5500,4600 5000,4600 ; 5325,2555 5325,2660 5460,2660 5460,2555 5325,2555 ; 5500,3655 5500,3780 5620,3780 5620,3675 5600,3655 5500,3655 ; 5600,3100 5600,3300 5860,3300 5860,3250 5720,3250 5660,3190 5660,3100 5600,3100 ; 6005,6420 6600,6420 6600,6550 6005,6550 6005,6420 ; 6450,5800 6450,6150 6600,6150 6600,5800 6450,5800 ; 6815,6250 6815,6450 7700,6450 7700,6250 6815,6250 ; 7000,4450 7600,4450 7600,4390 7060,4390 7000,4450 ; 8290,1835 8290,2065 8415,2065 8415,1835 8290,1835 ; 8360,4475 8360,4750 8440,4750 8440,4475 8360,4475 ; 8555,2565 8555,2685 8700,2685 8700,2565 8555,2565 ; 8755,3685 8755,3775 8870,3775 8870,3685 8755,3685 ; 8850,3000 8850,3200 8925,3200 8925,3000 8850,3000 ; 8900,4385 8900,4455 9045,4455 9045,4300 8985,4300 8900,4385 ; 9150,3000 9150,3130 9300,3130 9300,3000 9150,3000 ; 10200,2550 10200,2650 10350,2650 10350,2550 10200,2550 ; 10450,3000 10450,3200 10550,3200 10550,3000 10450,3000 ; 10500,970 10500,1130 10645,1130 10645,970 10500,970 ; 10535,4385 10535,4445 10670,4445 10670,4300 10620,4300 10535,4385 ; 10580,1565 10640,1565 10695,1510 10765,1510 10855,1600 10855,1650 10580,1650 10580,1565 ; 10600,5950 10850,5950 11015,6115 11015,6255 10905,6255 10600,5950 ; 10750,3000 10950,3000 10950,3130 10800,3130 10750,3080 10750,3000 ; 10860,1245 10860,1440 11020,1440 11020,1245 10860,1245 ; 11050,4950 11600,4950 11600,5250 11300,5250 11300,5345 11050,5345 11050,4950 ; 11100,2350 11100,2420 11270,2420 11200,2350 11100,2350 ; 11135,5945 11135,6070 11280,6070 11280,5945 11135,5945 ; 11150,6550 11800,6550 11615,6735 11335,6735 11150,6550 ; 11450,2150 11700,2150 11700,2350 11650,2350 11450,2150 ; 11600,4550 11830,4550 12030,4750 11800,4750 11600,4550 ; 11850,2550 11850,2650 11950,2650 11950,2550 11850,2550 ; 12085,3000 12085,3200 12155,3200 12155,3000 12085,3000 ; 12150,4405 12225,4330 12225,4270 12300,4270 12300,4440 12150,4440 12150,4405 ; 12400,3000 12400,3150 12550,3150 12550,3000 12400,3000 ; 12750,2250 12750,2400 12950,2400 12950,2250 12750,2250 ; 12830,1200 12830,1350 13125,1350 12975,1200 12830,1200 ; 12830,1900 12830,2020 13160,2020 13160,1900 12830,1900 ; 12835,1550 12835,1700 13185,1700 13035,1550 12835,1550 ; 13125,3580 13125,3755 13190,3755 13280,3665 13280,3580 13125,3580 ; 13200,2300 13400,2500 13400,3100 13650,3100 13650,3300 13200,3300 13200,2350 13200,2300 ; 13235,4170 13235,4350 13320,4350 13435,4235 13435,4170 13235,4170
  lines w20: 5800,200 5800,1095 7100,2395 7100,4605 ; 6400,0 6400,760 7905,2265 7905,4600
  text ".Layer_Name" at 15100,4785 h45 r90

## Silkscreen, mask and mechanical layers (free items; w line width, h text height)
Top Overlay:
  text "J16" at 14060,5720 h60
  text "J12" at 815,5685 h60
  text ".Layer_Name" at 15100,4785 h45 r90
  text "DISPLAY NODE" at 50,3575 h80
  text "PCB0010" at 55,3435 h80
  text "V10.26.2010" at 55,3305 h80
  text "J17" at 810,2425 h60
  text "J11" at 14040,2420 h60
  text "CNH" at 6625,410 h60
  text "CNL" at 6835,410 h60
  text "SPK+" at 7015,410 h60
  text "GND" at 6225,405 h60
  text "V IN" at 6435,405 h60
  text "J19" at 9910,315 h60
  text "SPK-" at 7010,110 h60
Bottom Overlay:
  text ".Layer_Name" at 15100,4785 h45 r90
Top Paste:
  text ".Layer_Name" at 15100,4785 h45 r90
Bottom Paste:
  text ".Layer_Name" at 15100,4785 h45 r90
Top Solder:
  text ".Layer_Name" at 15100,4785 h45 r90
Bottom Solder:
  text ".Layer_Name" at 15100,4785 h45 r90
Drill Guide:
  text ".Layer_Name" at 15100,4785 h45 r90
Board Outline:
  the board outline again, w8
Dimensions:
  text ".Layer_Name" at 15100,4785 h45 r90
Cutouts:
  drawing of 253 lines, arcs and shapes, not listed
  text ".Layer_Name" at 15100,4785 h45 r90
Mechanical 4:
  text ".Layer_Name" at 15100,4785 h45 r90
Drill Drawing:
  text ".Layer_Name" at 15100,4785 h45 r90

## Dimensions
450,0 to 450,7000 on Dimensions
450,0 to 400,400 on Dimensions
400,400 to 400,6600 on Dimensions
0,6550 to 15000,6550 on Dimensions
0,6550 to 400,6600 on Dimensions
400,6600 to 7500,6700 on Dimensions
7500,6700 to 14600,6600 on Dimensions

## Text inside footprints (layer, text, board x,y; h text height)
J11: Bottom Overlay "1" at 14290,665 h50 r180
J12: Bottom Overlay "1" at 683.34,6330 h50
J16: Bottom Overlay "1" at 14860,4720 h50 r180
J17: Bottom Overlay "1" at 130,2280 h50
J18: Top Overlay "1" at 10240,6795 h50 r180; Top Overlay "20" at 8190,6795 h50 r180
J19: Bottom Overlay "1" at 10665,70 h50 r90